# Altium PCB EtherWiz_Mini.PcbDoc (part 2 of 2)
Units mil, origin at the board's own origin, x right, y up, seen from the top; angles counter-clockwise.
Board outline 5188.98 x 2680 mil, 4 copper layers (Top Layer, GND, 5V, Bottom Layer), stack 23.756 mil thick; 69 components, 106 nets, 420 pads, 225 vias.
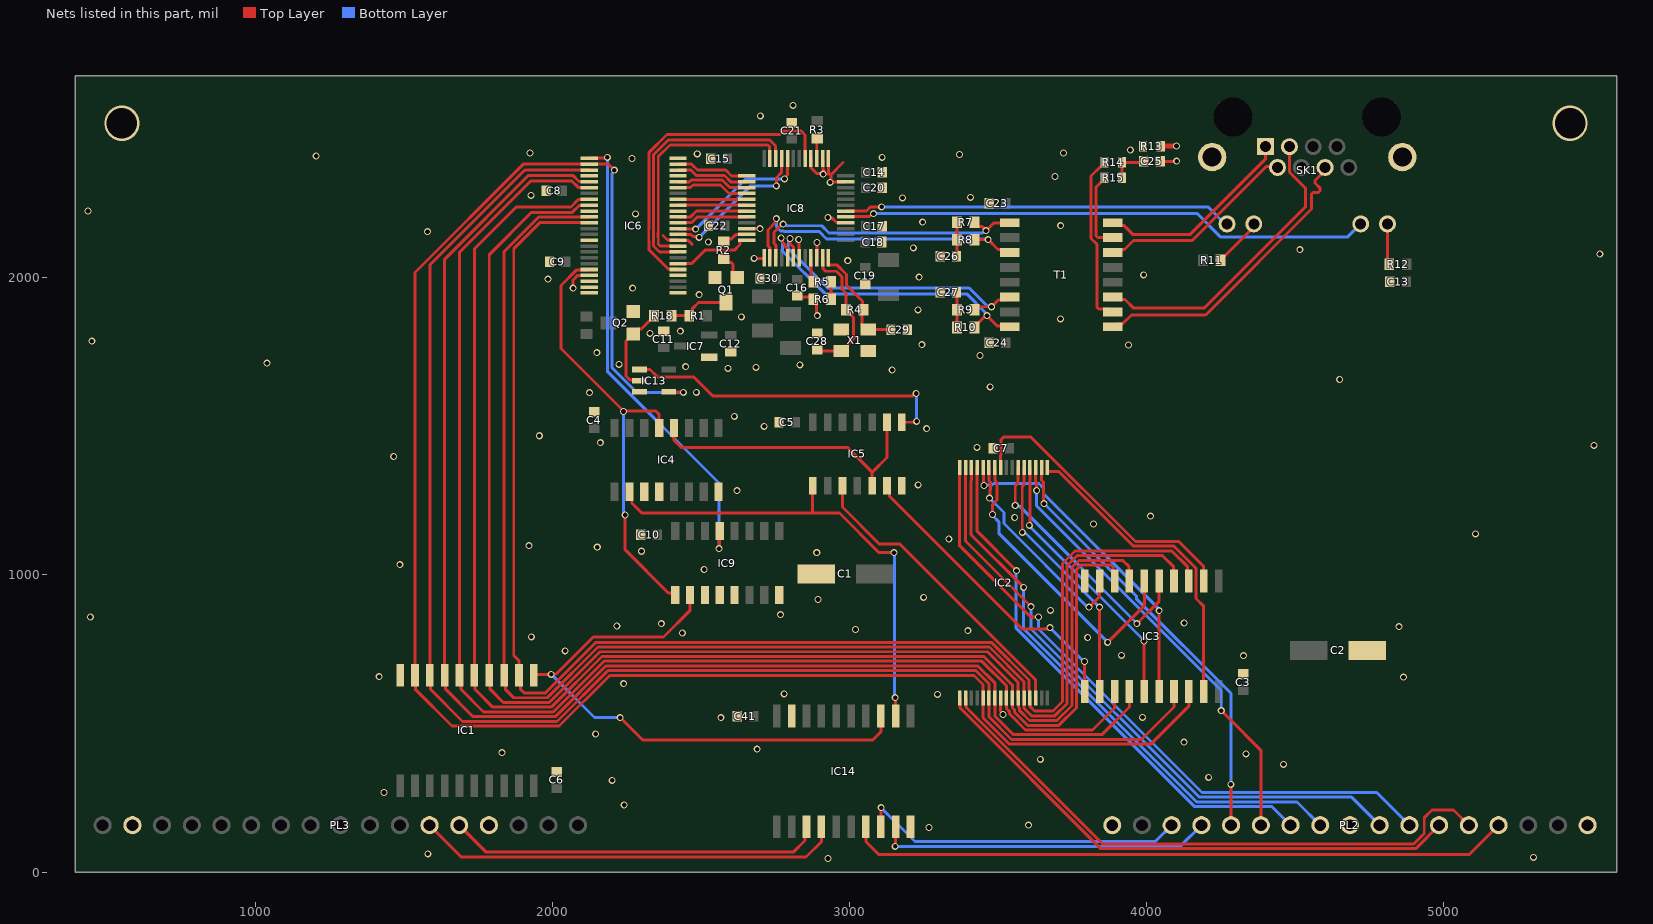
[diagram p4: the nets of this part, all layers, seen from the top]

## Via types
v1: diameter 23.62, hole 15.75, Top Layer to Bottom Layer, tented both sides, 223 vias
v2: diameter 118.11/118.11/118.11/118.11 (per signal layer), hole 102.36, Top Layer to Bottom Layer, 2 vias

## Nets (pads, with @x,y where several pads share a name; then routed paths per layer and width w, separated by ;. In a path a pad name is that pad's centre, name@x,y a point inside that pad or via, vN(x,y) a via of type N, cw(c..) or ccw(c..) an arc to the next point about the centre after c; other vN are vias at no path point) (continued)
BLA13: IC4.2 IC5.1 IC14.12 | length 1637.6
  Top Layer w10: IC4.2@2259.53,1279.96 2267.18,1272.31 2267.18,1242.11 2301.06,1208.23 2875.42,1208.23 ; IC5.1@2876.26,1300.16 2875.42,1299.32 2875.42,1208.23 ; v1(3149.61,1074.8) 3099.49,1074.8 2966.06,1208.23 2875.42,1208.23 ; v1(3153.54,586.61) 3154.43,585.73 3154.43,525.49 IC14.12@3155.31,524.61
  Bottom Layer w10: v1(3149.61,1074.8) 3151.57,1072.83 3151.57,588.58 v1(3153.54,586.61)
BPR/W: IC1.1 IC9.2 IC14.13 | length 1933.2
  Top Layer w10: IC1.1@1937.6,662.4 1940.55,665.35 v1(1996.06,665.35) 1997.15,666.44 2012.9,666.44 2137.8,791.34 2374.02,791.34 2463.92,881.24 2463.92,931.87 IC9.2@2463.27,932.52 ; v1(2228.35,519.68) 2303.15,444.88 3078.74,444.88 3105.31,471.46 IC14.13@3105.31,524.61
  Bottom Layer w10: v1(1996.06,665.35) 2141.73,519.68 v1(2228.35,519.68)
CLK2: PL3.4
D0: IC1.9 IC2.21 IC3.18 IC6.2 IC13.4 | length 6215.5
  Top Layer w10: v1(2208.66,2362.2) 2188.82,2382.05 IC6.2@2124.49,2382.05 1902.05,2382.05 1537.6,2017.6 IC1.9@1537.6,662.4 1538.67,661.33 1538.67,614.87 1662.52,491.02 2022.52,491.02 2193.23,661.73 3418.81,661.73 3449.49,631.05 IC2.21@3449.49,586.06 3449.49,519.6 3538.85,430.24 4014.13,430.24 4142.01,558.11 IC3.18@4142.01,607.72 ; IC13.4@2391.73,1616.14 2392.72,1615.16 2439.96,1615.16 v1(2440.94,1614.17)
  Bottom Layer w10: v1(2208.66,2362.2) 2208.66,2358.52 2200.91,2350.76 2200.91,1696.73 2263.78,1633.86 2283.46,1614.17 v1(2440.94,1614.17)
D1: IC1.8 IC2.22 IC3.17 IC6.3 | length 4974.4
  Top Layer w10: IC6.3@2124.49,2362.36 1907.36,2362.36 1587.6,2042.6 IC1.8@1587.6,662.4 1589.85,660.15 1589.85,614.87 1697.8,506.93 2015.93,506.93 2186.64,677.64 3425.39,677.64 3469.17,633.86 IC2.22@3469.17,586.06 3469.17,522.41 3545.44,446.14 3982.8,446.14 4092.01,555.35 IC3.17@4092.01,607.72
D2: IC1.7 IC2.23 IC3.14 IC6.5 | length 4724.1
  Top Layer w10: IC6.5@2124.49,2322.99 2123.58,2323.9 2089.65,2323.9 2068.9,2344.65 1919.65,2344.65 1637.6,2062.6 IC1.7@1637.6,662.4 1641.03,658.97 1641.03,614.87 1733.07,522.83 2009.34,522.83 2180.05,693.54 3431.98,693.54 3488.86,636.67 IC2.23@3488.86,586.06 3488.86,525.22 3552.03,462.05 3849.09,462.05 3942.01,554.96 IC3.14@3942.01,607.72
D3: IC1.6 IC2.25 IC3.13 IC6.6 | length 4551.3
  Top Layer w10: IC6.6@2124.49,2303.31 2123.58,2304.21 2086.84,2304.21 2066.25,2324.8 1926.38,2324.8 1687.6,2086.02 IC1.6@1687.6,662.4 1692.21,657.79 1692.21,614.87 1768.35,538.74 2002.76,538.74 2173.46,709.45 3445.43,709.45 3528.23,626.65 IC2.25@3528.23,586.06 3528.23,550.1 3539.09,539.24 3539.09,531.52 3592.66,477.95 3817.76,477.95 3892.01,552.2 IC3.13@3892.01,607.72
D4: IC1.5 IC2.26 IC3.8 IC6.8 | length 4874.7
  Top Layer w10: IC6.8@2124.49,2263.94 2123.58,2263.03 2087.35,2263.03 2062.67,2238.35 1878.35,2238.35 1737.6,2097.6 IC1.5@1737.6,662.4 1739.46,660.54 1739.46,614.87 1799.69,554.65 1996.17,554.65 2166.88,725.35 3452.02,725.35 3547.91,629.46 IC2.26@3547.91,586.06 3548.82,585.16 3548.82,552 3554.99,545.83 3554.99,538.11 3599.25,493.86 3704.29,493.86 3764.45,554.02 3764.45,1018.81 3778.55,1032.91 3880.48,1032.91 3886.62,1026.77 3886.62,985.15 IC3.8@3892.01,979.76
D5: IC1.4 IC2.27 IC3.7 IC6.9 | length 4810.4
  Top Layer w10: IC6.9@2124.49,2244.25 2123.58,2243.35 2090.16,2243.35 2066.81,2220 1930,2220 1787.6,2077.6 IC1.4@1787.6,662.4 1790.64,659.36 1790.64,614.87 1834.96,570.55 1989.58,570.55 2160.29,741.26 3464.16,741.26 3567.6,637.82 IC2.27@3567.6,586.06 3568.5,585.16 3568.5,554.81 3571.38,551.94 3571.38,544.22 3605.83,509.76 3697.7,509.76 3748.54,560.6 3748.54,1025.4 3771.97,1048.82 3919.8,1048.82 3941.33,1027.29 3941.33,980.44 IC3.7@3942.01,979.76
D6: IC1.3 IC2.28 IC3.4 IC6.11 | length 4849.1
  Top Layer w10: IC6.11@2124.49,2204.88 2123.7,2204.09 1954.11,2204.09 1837.6,2087.59 IC1.3@1837.6,662.4 1841.82,658.18 1841.82,614.87 1870.24,586.46 1982.99,586.46 2153.7,757.17 3470.75,757.17 3587.28,640.63 IC2.28@3587.28,586.06 3587.28,550.81 3612.42,525.67 3691.12,525.67 3732.64,567.19 3732.64,1031.98 3765.38,1064.72 4053.5,1064.72 4090.94,1027.29 4090.94,980.84 IC3.4@4092.01,979.76
D7: IC1.2 IC2.29 IC3.3 IC6.12 | length 4817.4
  Top Layer w10: IC6.12@2124.49,2185.2 1957.7,2185.2 1870,2097.49 1870,728.43 1887.6,710.83 IC1.2@1887.6,662.4 1892.73,657.27 1892.73,615.14 1905.51,602.36 1976.4,602.36 2147.11,773.07 3477.34,773.07 3604.09,646.31 3604.09,612.51 3606.06,610.54 3606.06,586.97 3607.87,585.16 3607.87,555.96 3622.26,541.57 3684.53,541.57 3716.73,573.78 3716.73,1038.57 3758.79,1080.63 4084.84,1080.63 4138.18,1027.29 4138.18,983.59 IC3.3@4142.01,979.76
ERX_N: IC8.5 R10.2 T1.8 | length 1053.8
  Top Layer w10: v1(2770.15,2133.72) 2772.75,2131.12 2772.75,2121.21 2782.26,2111.71 2782.26,2107.32 2790.43,2099.14 2790.43,2068.46 IC8.5@2791.34,2067.56 ; R10.2@3421.26,1832.83 3421.26,1835.79 3455.07,1869.6 3459.99,1869.6 v1(3462.6,1872.2) 3496.76,1838.04 3536.33,1838.04 T1.8@3539.37,1835
  Bottom Layer w10: v1(2770.15,2133.72) 2772.75,2131.12 2772.75,2121.21 2773.79,2120.17 2773.79,2090.3 2918.31,1945.78 3394.55,1945.78 3456.4,1883.93 3456.4,1882.09 3462.6,1875.89 v1(3462.6,1872.2)
ERX_P: IC8.6 R9.2 T1.6 | length 1001.8
  Top Layer w10: v1(2799.64,2132.24) 2799.97,2131.91 2799.97,2114.66 2810.97,2103.66 IC8.6@2811.02,2067.56 IC8.6@2811.02,2067.56 ; R9.2@3426.34,1894.25 3426.34,1895.69 3432.99,1902.34 v1(3478.06,1902.34) 3500.76,1925.04 3529.41,1925.04 T1.6@3539.37,1935
  Bottom Layer w10: v1(2799.64,2132.24) 2799.64,2128.56 2793.79,2122.71 2793.79,2098.58 2926.6,1965.78 3402.83,1965.78 3463.66,1904.95 3475.45,1904.95 v1(3478.06,1902.34)
ETX_N: IC8.2 R8.2 T1.3 | length 1040
  Top Layer w10: IC8.2@2732.28,2067.56 2732.28,2100.97 2725.89,2107.36 2725.89,2161.04 2751.33,2186.48 2751.33,2196.37 v1(2753.94,2198.98) ; R8.2@3421.26,2128.11 v1(3466.54,2128.11) 3499.69,2094.96 3529.41,2094.96 T1.3@3539.37,2085
  Bottom Layer w10: v1(2753.94,2198.98) 2753.94,2170.93 2767.35,2157.52 2778.58,2157.52 2781.14,2154.96 2898.65,2154.96 2922.89,2130.72 3463.93,2130.72 v1(3466.54,2128.11)
ETX_P: IC8.3 R7.2 T1.1 | length 971
  Top Layer w10: IC8.3@2751.97,2067.56 2751.97,2109.12 2745.58,2115.51 2745.58,2152.89 2764.85,2172.17 2765,2172.17 2773.07,2180.24 v1(2776.76,2180.24) ; R7.2@3421.26,2187.17 3421.26,2184.74 3432.99,2173.01 3444.73,2173.01 v1(3459.37,2158.38) 3485.99,2185 T1.1@3539.37,2185
  Bottom Layer w10: v1(2776.76,2180.24) 2779.36,2177.63 2786.75,2177.63 2789.43,2174.96 2906.93,2174.96 2931.17,2150.72 3448.02,2150.72 3455.68,2158.38 v1(3459.37,2158.38)
GND: C1.2 C2.2 C3.1 C4.1 C5.1 C6.1 C7.1 C8.1 C9.1 C10.1 C11.1 C12.1 C13.1 C14.1 C15.1 C16.1 C17.1 C18.1 C19.1 C20.1 C21.1 C22.1 C23.1 C24.1 C26.1 C27.1 C28.1 C29.1 C30.1 C41.1 IC1.10 IC2.24 IC3.10 IC4.3 IC4.4 IC4.8 IC5.7 IC6.4 IC6.10 IC6.15 IC6.21 IC6.22 IC6.23 IC6.24 IC6.25 IC6.28 IC6.34 IC6.39 IC6.45 IC6.48 IC7.1 IC8.1 IC8.7 IC8.10 IC8.16 IC8.23 IC8.25 IC8.26 IC8.28 IC8.46 IC9.3 IC9.4 IC9.5 IC9.8 IC13.3 IC14.10 IC14.19 PL2.1 PL2.9 PL2.17 PL3.16 Q1.2 Q2.2 R6.1 R13.1 X1.2 X1.4 | length 992.3
  Top Layer w10: v1(2070,1965) 2070,1992.55 2085.49,2008.03 IC6.21@2124.49,2008.03 ; 2372.59,2142.27 2387.82,2127.05 2421.85,2127.05 IC6.34@2422.76,2126.14 2423.66,2125.24 2457.6,2125.24 2470.47,2112.36 ; IC8.46@2654.02,2165.51 2654.24,2165.29 2698.78,2165.29 v1(2699.01,2165.06) ; v1(2679.13,2065.12) 2711.69,2065.12 2712.6,2066.02 IC8.1@2712.6,2067.56 ; C16.1@2824.8,1935.2 2870.08,1935.2 R6.1@2879.92,1925.35 ; v1(2828.93,2128.55) 2829.82,2127.66 2829.82,2068.45 IC8.7@2830.71,2067.56 ; IC8.28@2870.08,2401.26 2870.98,2400.35 2870.98,2369.68 2889.47,2351.19 2908.81,2351.19 v1(2911.42,2348.58) ; R6.1@2877.95,1927.32 2889.68,1915.59 2889.68,1874.25 v1(2891.73,1872.2) ; IC8.10@2889.76,2067.56 2890.09,2067.88 2890.09,2118.57 v1(2890.41,2118.89) ; IC8.26@2909.45,2401.26 2910.35,2400.35 2910.35,2363.02 ; 2914.02,2363.02 2914.02,2351.19 v1(2911.42,2348.58) ; v1(2927.17,2202.91) 2929.77,2200.31 2941.93,2200.31 2956.13,2186.1 2986.81,2186.1 IC8.16@2987.72,2185.2 ; IC8.25@2929.13,2401.26 2929.13,2348.58 ; v1(2935.04,2321.02) v1@2936.1,2322.09 ; 2978.35,2387.95 2938.98,2348.58 ; IC8.23@2987.72,2322.99 2986.81,2322.09 v1@2936.1,2322.09 ; IC2.24@3508.54,586.06 3508.54,541.35 3516.37,533.52 v1(3516.37,529.83) ; v1(2911.42,2348.58) 2929.13,2348.58 ; 2929.13,2348.58 2938.98,2348.58 ; v1@2936.1,2322.09 2937.65,2323.63 2937.65,2347.25 2938.98,2348.58
  other v1: 2927.6,45.33 5301.62,49.27 1581.14,61.08 3267.72,149.61 3602.36,157.48 2241.84,225.32 1433.07,267.72 2201.38,308.33 4208.66,318.9 4460.63,362.2 3642.32,379.19 4334.65,397.64 1830.71,401.57 2688.98,413.39 4125.98,437.01 2145.67,464.57 2566.93,519.68 3986.3,520.65 3296.06,597.84 2780.12,599.66 2240.16,633.66 4864.32,655.92 1417.32,657.48 4326.06,728.23 3915.33,729.19 2042.99,744.41 3801.52,789.31 1929.13,791.34 2437.6,804.39 3398.23,812.26 3020.27,816.2 4849.32,825.92 2217.12,828.01 2366.73,835.89 4126.06,838.23 444.88,858.27 2767.72,866.14 3676.3,880.65 2893.7,917.32 3249.55,924.3 2511.06,1018.23 1486.44,1034.54 2889.76,1074.8 2299.67,1079.55 2151.06,1093.23 1921.26,1098.43 3334.18,1120.53 5106.82,1138.13 3821.3,1171.15 3556.06,1193.23 4013.25,1197.72 2621.06,1283.23 3231.06,1303.23 1466.06,1398.23 3429.13,1429.13 5505.78,1435.84 2161.33,1445.14 1956.06,1468.23 3259.84,1492.13 2712.6,1500 2612.64,1533.52 2125,1613.37 2484.25,1614.17 3473.25,1632.72 4649.61,1657.48 3143.44,1689.77 2591.2,1695.34 2685.03,1698.63 2448.82,1700.79 2832.68,1706.85 2224.41,1708.66 1039.37,1712.6 3438.98,1738.35 2149.61,1748.03 3938.98,1773.78 3243.44,1774.77 450.23,1786.67 2328.74,1813.15 2430.91,1820.35 3710.3,1861.47 2635.83,1868.27 3230.31,1891.89 2494.09,1943.07 2270,1965 1985,1995 3234.25,2002.13 3990.18,2009.73 2994.09,2057.24 5525,2080 4515.75,2094.49 3214.57,2100.55 2525,2120 1579.47,2154.85 3710.63,2175.35 3246.06,2187.17 2280,2215 437.01,2224.41 3178.21,2268.75 3407.48,2270.39 1927.93,2277.18 3691.41,2340.56 2267.72,2401.57 3110,2405 1205,2410 3370,2415 2487.61,2416.98 1925,2420 3720,2420 3945,2430 2700,2545 2810.12,2580.12
GND_CHASS: C25.1 R13.2 SK1.S1 SK1.S2 | length 108.3
  Top Layer w10: C25.1@4045.28,2391.89 v1@4100.39,2391.89
  Top Layer w15.75: R13.2@4047.24,2443.07 v1(4100.39,2443.07)
  other v1: 4100.95,2392.47
  other v2: 551.18,2520 5425.2,2520
INT_3v3: IC13.2 Q2.1 R18.2 | length 300.9
  Top Layer w10: IC13.2@2293.31,1653.54 2290.24,1656.61 2260.71,1656.61 2248.03,1669.29 2248.03,1786.8 2289.31,1828.08 2300.37,1828.08 2329.8,1857.52 2330.79,1857.52 2342.52,1869.25 R18.2@2342.52,1872.2
INT_Read_nEN: IC5.8 IC13.1 | length 1117.9
  Top Layer w10: IC13.1@2293.31,1690.94 2328.74,1690.94 2354.33,1665.35 2476.38,1665.35 2539.21,1602.52 3213.01,1602.52 3220.72,1610.24 v1(3224.41,1610.24) ; IC5.8@3176.26,1513.7 3226.3,1513.7 v1@3228.35,1515.75
  Bottom Layer w10: v1(3224.41,1610.24) 3225.1,1609.55 3225.1,1517.44 v1(3225.79,1516.75)
LA2: IC14.3 PL3.5 | length 1266.2
  Top Layer w10: PL3.5@1686.61,157.48 1777.48,66.61 2810.71,66.61 2849.79,105.69 2849.79,147.03 IC14.3@2855.32,152.56
LA3: IC14.4 PL3.6 | length 1434.6
  Top Layer w10: PL3.6@1586.61,157.48 1693.39,50.71 2853.86,50.71 2905.32,102.17 IC14.4@2905.32,152.56
LA4: IC2.18 PL2.5 | length 2014.1
  Top Layer w10: IC2.18@3390.43,586.06 3391.34,585.16 3391.34,555.26 3852.11,94.49 4898.77,94.49 4934.25,129.97 4934.25,182.28 4960.63,208.66 5033.07,208.66 PL2.5@5084.25,157.48
LA5: IC2.17 PL2.6 | length 1875.6
  Top Layer w10: IC2.17@3370.75,586.06 3371.65,585.16 3371.65,552.45 3845.52,78.58 4905.35,78.58 PL2.6@4984.25,157.48
LA6: IC2.16 PL2.7 | length 2190.3
  Top Layer w10: IC2.16@3370.75,1361.65 3370.75,1097.76 3610.28,858.23 v1(3636.06,858.23)
  Bottom Layer w10: v1(3636.06,858.23) 3636.06,818.23 4186.57,267.72 4774.02,267.72 PL2.7@4884.25,157.48
LA7: IC2.15 PL2.8 | length 2081.7
  Top Layer w10: IC2.15@3390.43,1361.65 3390.43,1113.86 v1(3611.06,893.23)
  Bottom Layer w10: v1(3611.06,893.23) 3611.06,818.23 4177.48,251.81 4689.92,251.81 PL2.8@4784.25,157.48
LA8: IC2.14 PL2.10 | length 1889.2
  Top Layer w10: IC2.14@3410.12,1361.65 3410.12,1317.85 3408.9,1316.63 3408.9,1135.39 v1(3586.06,958.23)
  Bottom Layer w10: v1(3586.06,958.23) 3586.06,818.23 4168.39,235.91 4505.83,235.91 PL2.10@4584.25,157.48
LA9: IC2.13 PL2.11 | length 1794.1
  Top Layer w10: IC2.13@3429.8,1361.65 3429.8,1146.61 v1(3562.13,1014.29)
  Bottom Layer w10: v1(3562.13,1014.29) 3561.06,1013.23 3561.06,820.73 4161.8,220 4421.73,220 PL2.11@4484.25,157.48
LA10: IC2.3 PL2.12 | length 1519.6
  Top Layer w10: IC2.3@3626.65,1361.65 3625.75,1360.75 3625.75,1315.62 3629.69,1311.68 v1(3629.69,1283.81) ; v1(4251.06,543.23) 4276.08,518.21 4384.25,410.04 PL2.12@4384.25,157.48
  Bottom Layer w10: v1(3629.69,1283.81) 3628.62,1282.74 3628.62,1233.7 4251.06,611.26 v1(4251.06,543.23)
LA11: IC2.2 PL2.13 | length 1468.4
  Top Layer w10: IC2.2@3646.34,1361.65 3646.34,1318.35 3652.4,1312.28 3652.4,1242.05 v1(3654.53,1239.92) ; v1(4283.46,295.28) 4283.86,294.88 4283.86,157.87 PL2.13@4284.25,157.48
  Bottom Layer w10: v1(3654.53,1239.92) 3965.3,929.15 3965.3,919.52 4283.46,601.35 v1(4283.46,295.28)
LA12: IC14.9 PL2.14 | length 1126.7
  Top Layer w10: v1(3153.54,86.61) 3154.43,87.5 3154.43,151.67 IC14.9@3155.31,152.56
  Bottom Layer w10: v1(3153.54,86.61) 4113.39,86.61 PL2.14@4184.25,157.48
LA13: IC14.8 PL2.15 | length 1112.3
  Top Layer w10: IC14.8@3105.31,152.56 3105.81,153.05 3105.81,216.04 v1(3106.3,216.54)
  Bottom Layer w10: v1(3106.3,216.54) 3220.31,102.52 4029.29,102.52 PL2.15@4084.25,157.48
LINK: IC8.17 SK1.11 | length 1787.5
  Top Layer w10: IC8.17@2987.72,2204.88 2988.62,2205.79 3067.02,2205.79 3077.02,2215.79 v1(3080.71,2215.79)
  Bottom Layer w10: v1(3080.71,2215.79) 4170.04,2215.79 4248.03,2137.8 4677.17,2137.8 SK1.11@4720.47,2181.1
NetC25_2: C25.2 R14.1 R15.1 | length 125.6
  Top Layer w10: R15.1@3917.32,2336.77 R14.1@3917.32,2387.95 3986.22,2387.95 C25.2@3990.16,2391.89
NetC26_2: C26.2 R7.1 R8.1 | length 118.9
  Top Layer w10: C26.2@3360.24,2069.05 3362.2,2071.02 R8.1@3362.2,2128.11 R7.1@3362.2,2187.17
NetC27_2: C27.2 R9.1 R10.1 | length 102.4
  Top Layer w10: R10.1@3362.2,1832.83 3362.2,1884.02 C27.2@3362.2,1935.2
NetC28_2: C28.2 IC8.11 R4.2 X1.1 | length 481
  Top Layer w10: C28.2@2891.73,1758.03 2896.65,1753.11 X1.1@2972.44,1753.11 3013.78,1794.45 3013.78,1866.3 3002.87,1877.2 2999.92,1877.2 2988.19,1888.94 2988.19,1948.28 2974.25,1962.22 2974.25,2003.93 2956.37,2021.81 2919.29,2021.81 2910.35,2030.75 2910.35,2066.65 IC8.11@2909.45,2067.56
NetC29_2: C29.2 IC8.12 R4.1 X1.3 | length 397.9
  Top Layer w10: IC8.12@2929.13,2067.56 2929.13,2044.43 2930.04,2043.52 2957.15,2043.52 2990.16,2010.51 2990.16,1974.57 3044.01,1920.72 3044.01,1895.13 R4.1@3047.24,1891.89 3041.34,1885.98 3041.34,1847.47 3042.4,1846.41 3042.4,1841.61 3058.07,1825.94 3138.78,1825.94 C29.2@3139.76,1824.96
NetIC8_9: IC8.9 R5.2 | length 84.4
  Top Layer w10: IC8.9@2870.08,2067.56 2870.08,1994.25 R5.2@2877.95,1986.38
NetIC8_27: IC8.27 R3.1 | length 68.2
  Top Layer w10: IC8.27@2889.76,2401.26 2889.76,2466.69 R3.1@2891.73,2468.66
NetIC8_47: IC8.47 R2.1 | length 89.2
  Top Layer w10: R2.1@2578.74,2116.3 2578.74,2119.25 2590.47,2130.98 2603.27,2130.98 2617.2,2144.92 2653.11,2144.92 IC8.47@2654.02,2145.83
NetQ1_1: Q1.1 R2.2 | length 90.7
  Top Layer w10: R2.2@2576.77,2063.15 2588.5,2051.42 2602.28,2051.42 2608.27,2045.43 2608.27,2017.82 2624.86,2001.22 Q1.1@2625.68,2001.22
NetQ1_3: Q1.3 R1.1 R18.1 | length 209.9
  Top Layer w10: R18.1@2401.57,1872.2 R1.1@2460.63,1872.2 2472.36,1883.94 2472.36,1897.72 2491.46,1916.82 Q1.3@2584.9,1916.82
NetR5_1: R5.1 R6.2 | length 59.1
  Top Layer w10: R6.2@2937.01,1927.32 R5.1@2937.01,1986.38
NetR11_1: R11.1 SK1.10 | length 169.8
  Top Layer w10: R11.1@4249.13,2059.17 4249.13,2062.13 4260.87,2073.86 4263.82,2073.86 4360.47,2170.51 SK1.10@4360.47,2181.1
NetR12_1: R12.1 SK1.12 | length 138.4
  Top Layer w10: SK1.12@4810.47,2181.1 4810.47,2051.06 R12.1@4816.38,2045.16
NetR14_2: R14.2 T1.10 | length 575.9
  Top Layer w10: R14.2@3858.27,2387.95 3858.27,2384.02 3852.36,2378.11 3848.62,2378.11 3812.99,2342.48 3812.99,2132.05 3832.68,2112.36 3832.68,1900.82 3838.53,1894.96 3875.87,1894.96 T1.10@3885.83,1885
NetR15_2: R15.2 T1.15 | length 266.3
  Top Layer w10: R15.2@3858.27,2336.77 3858.27,2332.83 3829.72,2304.29 3829.72,2140.86 3835.58,2135 T1.15@3885.83,2135
PA0: IC2.1 IC3.19 | length 1073.5
  Top Layer w10: IC2.1@3666.02,1361.65 3666.02,1348.78 3666.93,1347.87 3704.23,1347.87 3955.57,1096.54 4091.84,1096.54 4165.71,1022.67 4165.71,920.91 4192.01,894.61 IC3.19@4192.01,607.72
PA1: IC2.12 IC3.16 | length 1117.9
  Top Layer w10: IC2.12@3449.49,1361.65 3450.39,1360.75 3450.39,1302.76 v1(3452.52,1300.63) ; IC3.16@4042.01,607.72 v1(4042.01,879.37)
  Bottom Layer w10: v1(3452.52,1300.63) 3454.49,1302.6 3479.33,1302.6 3484.33,1307.6 3638.02,1307.6 3652.4,1293.22 3652.4,1274.17 4035.65,890.93 4035.65,889.42 4042.01,883.06 v1(4042.01,879.37)
PA2: IC2.4 IC3.15 | length 915.1
  Top Layer w10: v1(3605,1166.77) 3606.97,1168.74 IC2.4@3606.97,1361.65 ; v1(3990.83,777.01) 3991.42,776.42 3991.42,608.31 IC3.15@3992.01,607.72
  Bottom Layer w10: v1(3605,1166.77) 3605,1164.8 3990.83,778.98 v1(3990.83,777.01)
PA3: IC2.5 IC3.12 | length 869.1
  Top Layer w10: v1(3581.38,1143.15) 3581.38,1296.18 3587.28,1302.09 IC2.5@3587.28,1361.65 ; v1(3841.22,891.18) 3841.81,890.6 3841.81,763.09 3841.61,762.9 3841.61,608.11 IC3.12@3842.01,607.72
  Bottom Layer w10: v1(3581.38,1143.15) 3583.98,1140.54 3591.86,1140.54 v1(3841.22,891.18)
PA4: IC2.11 IC3.9 | length 719.6
  Top Layer w10: IC2.11@3469.17,1361.65 3469.17,1316.1 3475.24,1310.04 3475.24,1288.06 3472.21,1285.04 3472.21,1259.38 v1(3471.06,1258.23) ; v1(3805.79,891.18) 3842.01,927.4 IC3.9@3842.01,979.76
  Bottom Layer w10: v1(3471.06,1258.23) 3519.69,1209.61 3519.69,1172.72 3798.61,893.79 3803.18,893.79 v1(3805.79,891.18)
PA5: IC2.10 IC3.6 | length 1016.5
  Top Layer w10: v1(3481.06,1203.23) 3481.06,1236.1 3496.58,1251.62 3496.58,1311.19 3488.86,1318.91 IC2.10@3488.86,1361.65 ; v1(3868.78,773.07) 3992.01,896.3 IC3.6@3992.01,979.76
  Bottom Layer w10: v1(3481.06,1203.23) 3481.06,1199.54 3503.78,1176.83 3503.78,1138.07 v1(3868.78,773.07)
PA6: IC2.6 IC3.5 | length 881.2
  Top Layer w10: v1(3557.76,1233.7) 3557.76,1299.86 3567.6,1309.7 IC2.6@3567.6,1361.65 ; v1(3967.2,836.06) 3967.2,836.69 4042.01,911.5 IC3.5@4042.01,979.76
  Bottom Layer w10: v1(3557.76,1233.7) 3560.36,1231.09 3572.8,1231.09 3967.2,836.69 v1(3967.2,836.06)
PA7: IC2.9 IC3.2 | length 1009.3
  Top Layer w10: IC2.9@3508.54,1361.65 3507.64,1362.56 3507.64,1402.41 3509.61,1404.38 3509.61,1454.91 3518.12,1463.42 3611.17,1463.42 3962.16,1112.44 4108.15,1112.44 4192.01,1028.58 IC3.2@4192.01,979.76
PR/W: IC14.7 PL2.4 | length 2237.8
  Top Layer w10: IC14.7@3055.32,152.56 3055.32,102.17 3098.27,59.21 5085.98,59.21 PL2.4@5184.25,157.48
ROM_Latch_nEN: IC3.11 IC5.6 | length 1029.8
  Top Layer w10: IC5.6@3126.26,1300.16 3134.06,1292.36 3134.06,1265.24 3581.06,818.23 v1@3676.06,818.23 ; v1(3791.06,708.23) 3791.54,707.76 3791.54,608.19 IC3.11@3792.01,607.72
  Bottom Layer w10: v1(3674.65,822.16) 3788.58,708.23 v1(3791.06,708.23)
ROM_Latch_nSel: IC4.12 IC5.5 IC5.9 | length 987.3
  Top Layer w10: IC4.12@2409.53,1494.53 2409.53,1452.8 2433.19,1429.13 2992.24,1429.13 3076.26,1345.12 ; IC5.5@3076.26,1300.16 3076.26,1345.12 ; IC5.9@3126.26,1513.7 3126.26,1395.12 3076.26,1345.12
ROM_nCS: IC2.30 IC5.3 | length 1023.7
  Top Layer w10: IC5.3@2976.26,1300.16 2976.26,1228.03 3101.06,1103.23 3169.67,1103.23 3626.65,646.25 IC2.30@3626.65,586.06
RX_N: SK1.6 T1.9 | length 1016
  Top Layer w10: T1.9@3885.83,1835 3895.79,1844.96 3918.86,1844.96 3948.9,1875 4198.56,1875 4555.12,2231.56 4555.12,2281.54 4560.98,2287.4 4578.13,2287.4 4583.98,2293.26 4583.98,2301.54 4566.98,2318.54 4566.98,2326.83 4600.47,2360.32 SK1.6@4600.47,2371.1
RX_P: SK1.3 T1.11 | length 1030.4
  Top Layer w10: T1.11@3885.83,1935 3893.89,1926.93 3927.4,1926.93 3956.69,1897.64 4192.91,1897.64 4535.12,2239.84 4535.12,2300.72 4480.47,2355.37 SK1.3@4480.47,2441.1
SPEED: IC8.18 SK1.9 | length 1305.7
  Top Layer w10: IC8.18@2987.72,2224.57 3057.06,2224.57 3070.99,2238.5 v1(3108.27,2238.5)
  Bottom Layer w10: v1(3108.27,2238.5) 4206.5,2238.5 SK1.9@4263.9,2181.1
TX_N: SK1.2 T1.14 | length 675.9
  Top Layer w10: T1.14@3885.83,2085 3895.7,2094.88 3925.59,2094.88 3955.71,2125 4153.36,2125 4402.83,2374.46 4437.11,2374.46 SK1.2@4440.47,2371.1
TX_P: SK1.1 T1.16 | length 677.7
  Top Layer w10: T1.16@3885.83,2185 3895.79,2175.04 3924.63,2175.04 3954.67,2145 4145.08,2145 4400.47,2400.39 SK1.1@4400.47,2441.1
Wiz5_PR/W: IC6.1 IC9.13 | length 1594.2
  Top Layer w10: IC6.1@2124.49,2401.73 2125.39,2402.64 2182.64,2402.64 v1(2185,2405) ; v1(2561.06,1088.23) 2562.17,1089.33 2562.17,1145.98 IC9.13@2563.27,1147.09
  Bottom Layer w10: v1(2185,2405) 2185,1685.08 2561.06,1309.02 v1(2561.06,1088.23)
Wiz_A0: IC6.36 IC8.32 | length 502.2
  Top Layer w10: IC6.36@2422.76,2165.51 2423.66,2164.61 2481.22,2164.61 v1(2482.28,2163.54) ; v1(2781.5,2332.83) 2781.5,2336.52 2791.34,2346.36 IC8.32@2791.34,2401.26
  Bottom Layer w10: v1(2482.28,2163.54) 2651.57,2332.83 v1(2781.5,2332.83)
Wiz_A1: IC6.35 IC8.33 | length 506.4
  Top Layer w10: IC6.35@2422.76,2145.83 2466.79,2145.83 2474.03,2138.59 2491.49,2138.59 v1(2494.09,2135.98) ; v1(2753.94,2309.21) 2753.94,2337.4 2771.65,2355.12 IC8.33@2771.65,2401.26
  Bottom Layer w10: v1(2494.09,2135.98) 2667.32,2309.21 v1(2753.94,2309.21)
Wiz_D0: IC6.47 IC8.37 | length 247.6
  Top Layer w10: IC6.47@2422.76,2382.05 2468.5,2382.05 2488.19,2362.36 2583.23,2362.36 2602.91,2342.68 IC8.37@2654.02,2342.68
Wiz_D1: IC6.46 IC8.38 | length 247.6
  Top Layer w10: IC6.46@2422.76,2362.36 2465.7,2362.36 2484,2344.05 2579.04,2344.05 2600.11,2322.99 IC8.38@2654.02,2322.99
Wiz_D2: IC6.44 IC8.39 | length 243.7
  Top Layer w10: IC6.44@2422.76,2322.99 2461.13,2322.99 2466.29,2328.15 2572.45,2328.15 2597.3,2303.31 IC8.39@2654.02,2303.31
Wiz_D3: IC6.43 IC8.40 | length 246.8
  Top Layer w10: IC6.43@2422.76,2303.31 2423.66,2304.21 2464.84,2304.21 2472.87,2312.24 2565.87,2312.24 2594.49,2283.62 IC8.40@2654.02,2283.62
Wiz_D4: IC6.41 IC8.41 | length 231.3
  Top Layer w10: IC6.41@2422.76,2263.94 IC8.41@2654.02,2263.94
Wiz_D5: IC6.40 IC8.42 | length 231.3
  Top Layer w10: IC6.40@2422.76,2244.25 IC8.42@2654.02,2244.25
Wiz_D6: IC6.38 IC8.43 | length 239.4
  Top Layer w10: IC6.38@2422.76,2204.88 2465.7,2204.88 2485.38,2224.57 IC8.43@2654.02,2224.57
Wiz_D7: IC6.37 IC8.44 | length 239.4
  Top Layer w10: IC6.37@2422.76,2185.2 2468.5,2185.2 2488.19,2204.88 IC8.44@2654.02,2204.88
Wiz_nRD: IC6.32 IC8.34 | length 880.1
  Top Layer w10: IC6.32@2422.76,2086.77 2360.25,2086.77 2340.39,2106.63 2340.39,2130.52 2340.24,2130.68 2340.24,2157.03 2340.39,2157.19 2340.39,2414.23 2389.08,2462.91 2411.08,2462.91 2732.11,2462.91 2751.06,2443.96 2751.06,2402.17 IC8.34@2751.97,2401.26
Wiz_nRst: IC6.30 IC8.48 | length 271.5
  Top Layer w10: IC6.30@2422.76,2047.4 2423.66,2048.31 2469.41,2048.31 2513.78,2092.68 2612.2,2092.68 2631.77,2112.24 2631.77,2125.24 2632.67,2126.14 IC8.48@2654.02,2126.14
Wiz_nSel: IC6.29 IC8.29 | length 1092.2
  Top Layer w10: IC6.29@2422.76,2027.72 2421.85,2028.62 2391.17,2028.62 2324.49,2095.31 2324.49,2123.94 2324.33,2124.09 2324.33,2163.62 2324.49,2163.78 2324.49,2420.81 2386.11,2482.44 2765.75,2482.44 2776.65,2493.35 2837.24,2493.35 2850.39,2480.19 IC8.29@2850.39,2401.26
Wiz_nSel5: IC4.13 IC6.20 IC9.1 | length 1497.3
  Top Layer w10: IC6.20@2124.49,2027.72 2123.58,2026.81 2081.77,2026.81 2029.09,1974.13 2029.09,1762.24 2239.67,1551.67 v1(2239.67,1550.14) ; v1@2240.16,1551.18 2348.11,1551.18 2359.53,1539.76 IC4.13@2359.53,1494.53 ; v1(2244.88,1201.22) 2244.88,1084.41 2390.35,938.95 2406.84,938.95 IC9.1@2413.27,932.52
  Bottom Layer w10: v1(2239.67,1550.14) 2239.67,1210.12 2244.88,1204.91 v1(2244.88,1201.22)
Wiz_nWR: IC6.33 IC8.35 | length 797.9
  Top Layer w10: IC6.33@2422.76,2106.46 2421.85,2107.36 2362.16,2107.36 2356.3,2113.22 2356.3,2137.11 2356.14,2137.27 2356.14,2150.45 2356.3,2150.6 2356.3,2407.64 2395.67,2447.01 2725.52,2447.01 2731.38,2441.15 2731.38,2402.17 IC8.35@2732.28,2401.26
pads on no net: IC4.7 IC4.9 IC4.10 IC4.11 IC4.14 IC4.15 IC6.26 IC6.27 IC8.19 IC8.20 IC8.21 IC8.30 IC9.7 IC9.9 IC9.10 IC9.11 IC9.12 IC9.14 IC9.15 SK1. SK1.4 SK1.5 SK1.7 SK1.8 T1.4 T1.5 T1.12 T1.13

## Polygon pours and split planes (outlines as drawn)
1v2d on Top Layer "1V2D_L01_P000" (solid, remove dead copper, pour order 0): 2700,2360 2945,2360 2945,2110 2700,2110
GND on Top Layer "GND_L01_P005" (solid, remove dead copper, pour order 5): 393.7,0 5582.68,0 5582.68,2680 393.7,2680
3v3 on 5V "3V3_L03_P001" (solid, pour order 1): 2440,2680 2440,1615 4960,1615 4960,2680
5V on 5V "5V_L03_P004" (solid, pour order 4): 393.7,0 5582.68,0 5582.68,2680 393.7,2680
GND on GND "GND_L02_P002" (solid, pour order 2): 393.7,0 5582.68,0 5582.68,2680 393.7,2680
GND_CHASS on Bottom Layer "Bottom Layer-GND_CHASS" (solid, pour order 8): 393.7,2326.77 751.97,2326.77 748.03,2330.71 748.03,2445 4040,2445 4040,2299.21 5582.68,2299.21 5582.68,2680 748.03,2680 748.03,2681.1 394.8,2681.1 393.7,2680
GND on Bottom Layer "GND_L04_P010" (solid, remove dead copper, pour order 10): 393.7,0 5582.68,0 5582.68,2680 393.7,2680

## Keep-outs
Keep-Out Layer:
  the board outline again, w8

## Other copper
Top Layer:
  text ".PCB_RevNo" at 5486.54,888.55 h60 r90
  text ".Project_Title" at 5486.54,365.28 h60 r90

## Silkscreen, mask and mechanical layers (free items; w line width, h text height)
Top Overlay:
  text "ALVC164245" at 2295.28,1992.13 h39.37 r90
  text "HCT32" at 2937.01,1385.83 h39.37
  text ".PCB_RevNo" at 597.2,1374.49 h118.11 r90
  text "HCT138" at 2272.56,1369.6 h39.37
  text "HCT238" at 2469.41,1023.14 h39.37
  text "MX29F040" at 3539.37,834.65 h39.37 r90
  text "HCT273" at 3914.29,771.17 h39.37
  text "HCT245" at 1598.43,456.69 h39.37
  text ".Project_Title" at 597.2,350.87 h118.11 r90
  text "(C) IanJ '26" at 736.81,329.37 h60 r90
  text "HCT245" at 2871.8,326.09 h39.37
Board Shape:
  the board outline again, w8